# Altium PCB soldeerbout.PcbDoc (part 1 of 2)
Units mil, origin at the board's own origin, x right, y up, seen from the top; angles counter-clockwise.
Board outline 6625 x 4130 mil, 2 copper layers (Top Layer, Bottom Layer); 76 components, 74 nets, 291 pads, 71 vias.
Unrouted connection lines stored in the file: 2.
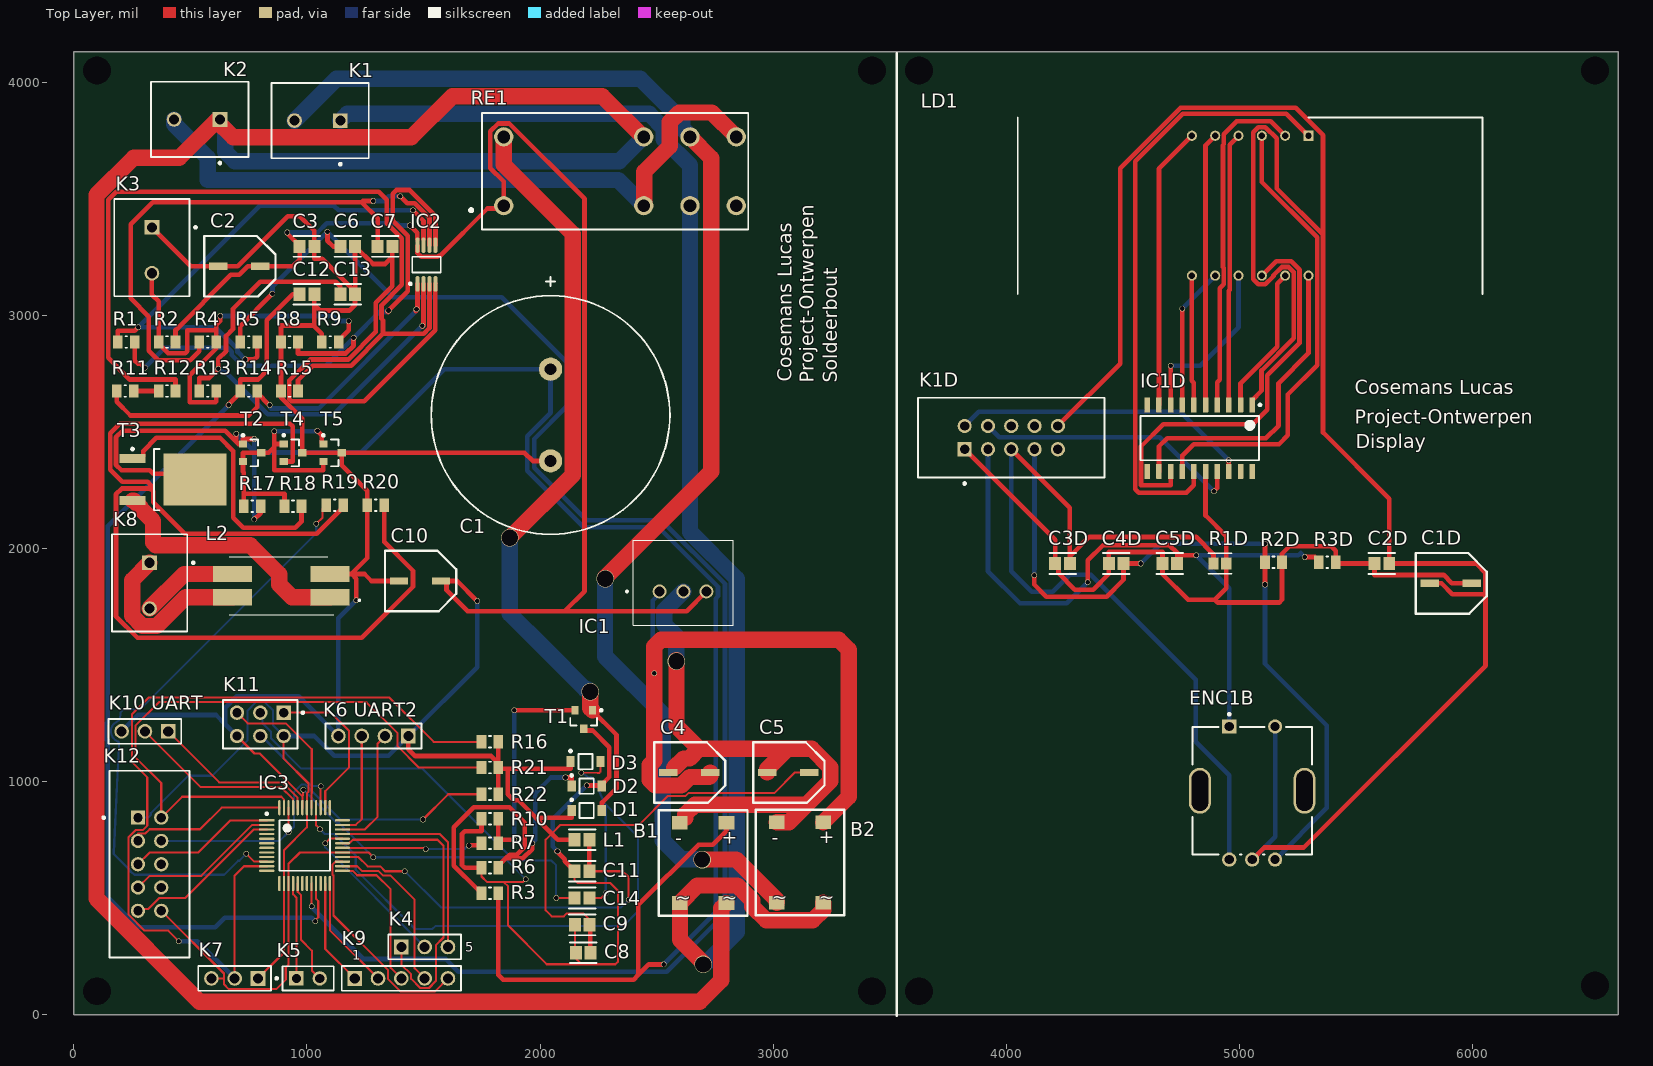
[diagram p0: Top Layer view]
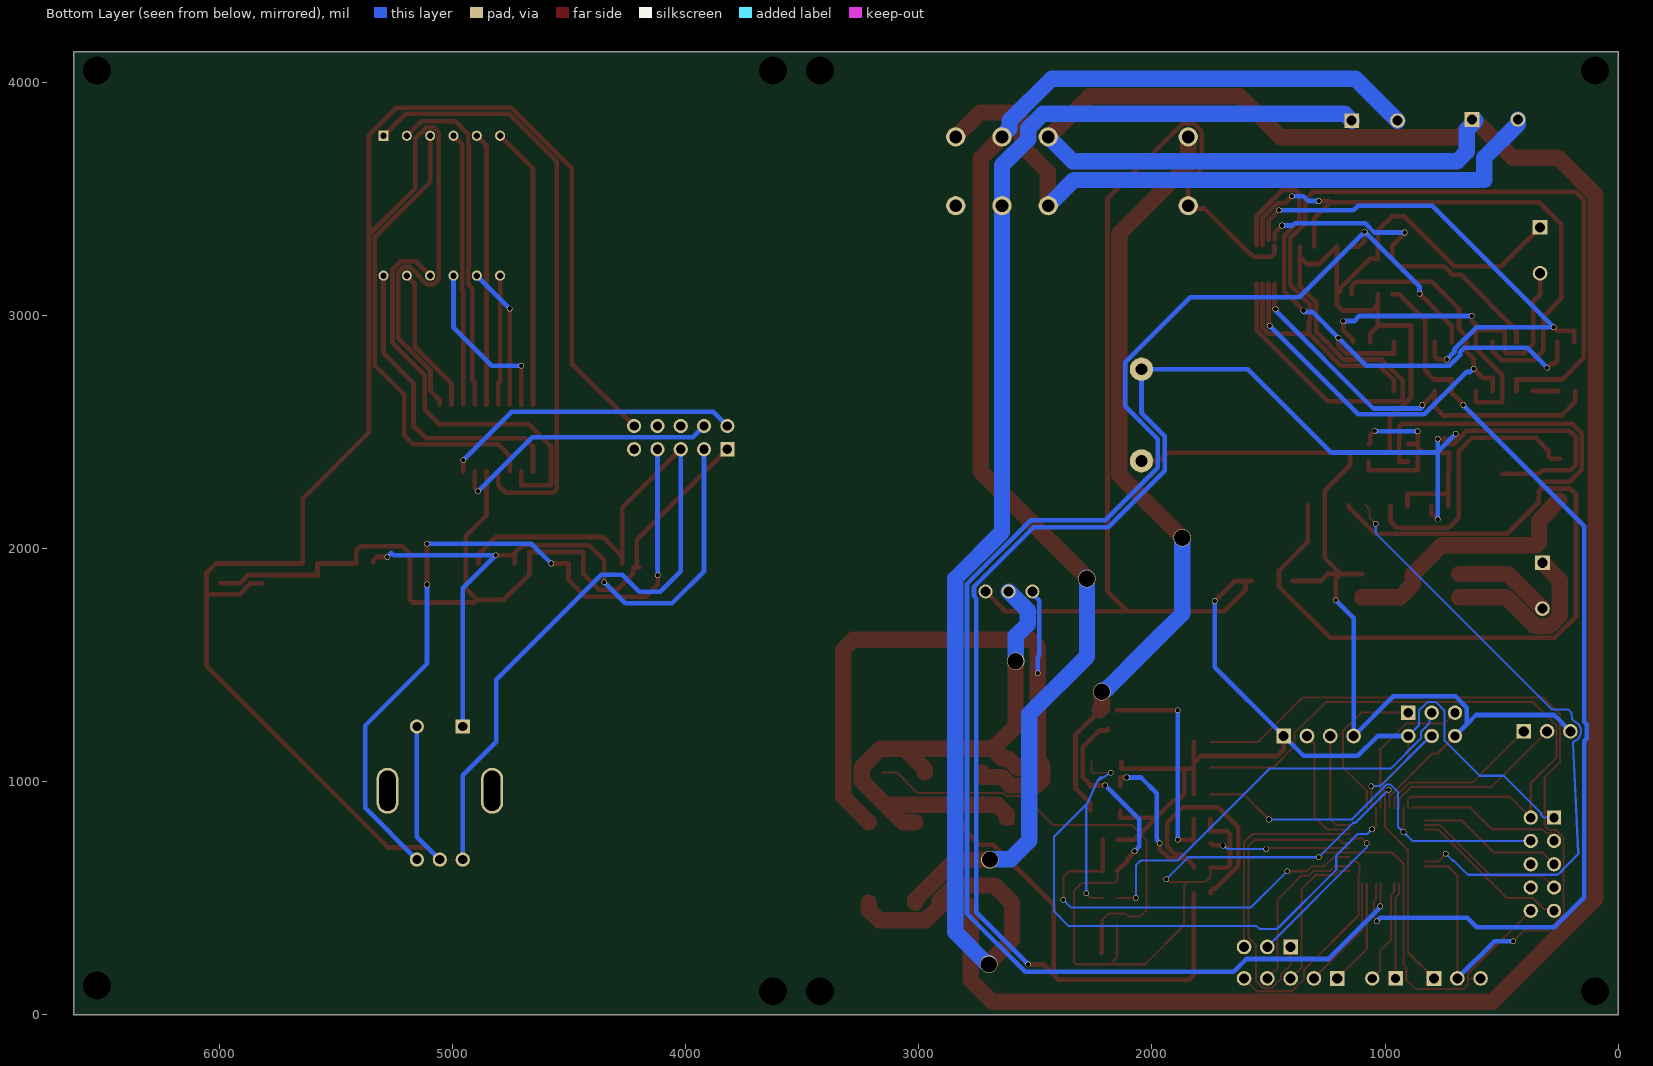
[diagram p1: Bottom Layer view, seen from below]

## Layer stack, top to bottom
Top Solder: solder mask 0.4, Solder Resist, Dk 3.5
Top Layer: signal copper 1.4
Dielectric 1: dielectric 12.6, FR-4, Dk 4.8
Bottom Layer: signal copper 1.4
Bottom Solder: solder mask 0.4, Solder Resist, Dk 3.5

## Board outline
0,0 6625,0 6625,4130 0,4130

## Design rules (kind name [scope] priority, off if disabled: settings)
Clearance [All] p1: gap=5 ignorepadtopadclearanceinfootprint=FALSE
ComponentClearance [All] p1: gap=5 collisioncheckmode=3 verticalgap=10 showdistances=FALSE
HoleSize [All] p1: absolutevalues=TRUE maxlimit=200 minlimit=1 maxpercent=80.000 minpercent=20.000
MinimumSolderMaskSliver [All] p1: minsoldermaskwidth=9
PolygonConnect [All] p1: connectstyle=Relief reliefconductorwidth=10 reliefentries=4 polygonreliefangle="90 Angle" airgapwidth=10
RoutingVias [All] p1: holewidth=20 width=24 viastyle="Through Hole" minholewidth=20 minwidth=24 maxholewidth=20 maxwidth=24
SilkToSolderMaskClearance [IsPad] p1: minsilkscreentomaskgap=5 clearancetoexposedcopper=TRUE
SolderMaskExpansion [All] p1: expansion=4 istentingtop=FALSE useseparateexpansions=TRUE expansionbottom=4 istentingbottom=FALSE soldermaskfromhole=TRUE
Width [All] p1: maxlimit=100 minlimit=9 preferedwidth=20 minimp=50.000000 maximp=50.000000 favimp=50.000000
26 further rules are at their usual default settings.

## Classes and differential pairs
component class voeding: B1 B2 C1 C4 C5 D1 D2 IC1 K1 K2 R3 R6 R7 R10 RE1 T1
component class thermokoppel: C2 C3 C6 C7 C12 C13 IC2 K3 R1 R2 R4 R5 R8 R9 R11 R12 R13 R14 R15
component class PWM_Soldeerbout: K8 L2 R17 R18 R19 R20 T2 T3 T4 T5
component class Display: C1D C2D C3D C4D C5D ENC1B IC1D K1D LD1 R1D R2D R3D
component class CPU: C8 C9 C10 C11 C14 D3 IC3 K4 K5 "K6 UART2" K7 K9 "K10 UART" K11 K12 L1 R16 R21 R22

## Components (designator, comment, footprint, x,y, rotation, side; value= is the part's Value field where it differs from the comment)
B1 "Bridge_Rectifier" ttf 2700,648.35 r0 top
B2 "Bridge_Rectifier" ttf 3115,650 r0 top
C1 "4700µf" CE_D25_L25_plugin 2045,2375 r90 top
C1D "100µf" CE_D6,3_L4,5 5906.42,1850 r0 top
C2 "10µf" CE_D6,3_L4,5 710,3210 r0 top
C2D "100nf" CC_0805_L 5611.42,1935 r0 top value="0.22 μF"
C3 "100nF" CC_0805_L 1000,3295 r0 top value="0.22 μF"
C3D "10nf" CC_0805_L 4241.42,1935 r0 top value="0.22 μF"
C4 "100µf" CE_D6,3_L4,5 2640,1038.35 r0 top
C4D "10nf" CC_0805_L 4471.42,1935 r0 top value="0.22 μF"
C5 "10µf" CE_D6,3_L4,5 3065,1038.35 r0 top
C5D "10nf" CC_0805_L 4701.42,1935 r0 top value="0.22 μF"
C6 "10nF" CC_0805_L 1175,3295 r0 top value="0.22 μF"
C7 "10nF" CC_0805_L 1335,3295 r0 top value="0.22 μF"
C8 "100nf" CC_0805_L 2185,265 r180 top value="0.22 μF"
C9 "100nf" CC_0805_L 2181.53,385 r180 top value="0.22 μF"
C10 "10µf" CE_D6,3_L4,5 1485,1860 r0 top
C11 "100nf" CC_0805_L 2180,615 r180 top value="0.22 μF"
C12 "10nF" CC_0805_L 1000,3090 r0 top value="0.22 μF"
C13 "10nF" CC_0805_L 1175,3090 r0 top value="0.22 μF"
C14 "100nf" CC_0805_L 2180,500 r0 top value="0.22 μF"
D1 "Diode" SOD-123FL 2200,875 r0 top value=15pF
D2 "Zener_Diode" SOD-123FL 2200,980.05 r0 top
D3 "Diode" SOD-123FL 2195,1085 r0 top value=15pF
ENC1B "PEC11R-4220F-S0012" PEC11R_4220F_S0012 5055,960 r0 top
IC1 "OKI-78SR-5/1.5-W36-C" OKI78SR515W36C 2512.64,1815 r0 top
IC1D "TM1637" SOP_20_M 4830,2472.72 r270 top
IC2 "Dual_Opamp" MSOP_8_M 1512.8,3217.32 r90 top
IC3 "ATMEGA4809" TQFP_48_M 990,725 r0 top
K1 "282836-2" "2x1 Schroef pin TECO-282836-2_V" 1045,3835 r180 top
K1D "1-1634688-0" "5x2 pin - TECO-1-1634688-0-10_V" 4021.42,2475 r0 top
K2 "282836-2" "2x1 Schroef pin TECO-282836-2_V" 528.43,3840 r180 top
K3 "282836-2" "2x1 Schroef pin TECO-282836-2_V" 335,3278.43 r270 top
K4 "61300311121" "3x1 pin" 1505,290 r0 top
K5 "M20-9990246" "2x1 pin" 1005,155 r0 top
"K6 UART2" "61300411121" "4x1 pin" 1285,1195 r180 top
K7 "61300311121" "3x1 pin" 690,155 r180 top
K8 "282836-2" "2x1 Schroef pin TECO-282836-2_V" 325,1840 r270 top
K9 "61300511121" "5x1 pin" 1405,155 r0 top
"K10 UART" "61300311121" "3x1 pin" 305,1215 r180 top
K11 "3x2 Pin_1" "3x2 pin FP-M20-9980346-MFG" 800,1245 r180 top
K12 "1-1634688-0" "5x2 pin - TECO-1-1634688-0-10_V" 325,645 r270 top
L1 "Choke" CC_0805_L 2180,750 r180 top
L2 "Common_Mode_Choke" 2545 890,1840 r90 top
LD1 "7SEG - KW4-801AVB" "7SEG - ELF-5125" 5296.42,3770 r270 top
R1 "18Kohm" R_0805_M 225,2885 r0 top
R1D "10K" CC_0805_m 4916.42,1935 r0 top
R2 "1Mohm" R_0805_M 400,2885 r0 top
R2D "10K" R_0805_M 5146.42,1940 r0 top
R3 "68Kohm" R_0805_M 1785,520 r0 top
R3D "10K" R_0805_M 5376.42,1940 r0 top
R4 "5.6Kohm" R_0805_M 575,2885 r0 top
R5 "5.6Kohm" R_0805_M 750,2885 r0 top
R6 "10Kohm" R_0805_M 1785,630 r0 top
R7 "10Kohm" R_0805_M 1785,735 r0 top
R8 "100ohm" R_0805_M 925,2885 r0 top
R9 "10Mohm" R_0805_M 1100,2885 r0 top
R10 "47Kohm" R_0805_M 1785,840 r0 top
R11 "18Kohm" R_0805_M 220,2675 r0 top
R12 "18Kohm" R_0805_M 400,2675 r0 top
R13 "5.6Kohm" R_0805_M 575,2675 r0 top
R14 "5.6Kohm" R_0805_M 750,2675 r0 top
R15 "100ohm" R_0805_M 925,2675 r0 top
R16 "47Kohm" R_0805_M 1785,1170 r180 top
R17 "47Kohm" R_0805_M 765,2180 r0 top
R18 "100ohm" R_0805_M 940,2180 r0 top
R19 "10Kohm" R_0805_M 1120,2185 r0 top
R20 "47Kohm" R_0805_M 1295,2185 r0 top
R21 "47Kohm" R_0805_M 1785,1060 r180 top
R22 "47Kohm" R_0805_M 1785,945 r180 top
RE1 "RELAY_GENERAL_PURPOSE" RT42 1844.21,3617.64 r0 top
T1 "Transistor_NPN" SOT_23 2187.4,1265.63 r270 top
T2 "Transistor_NPN" SOT_23 765,2410 r0 top
T3 "MOSFET_P (IRF9Z34NPBF)" TO_252 425,2295 r0 top
T4 "Transistor_NPN" SOT_23 940,2410 r0 top
T5 "Transistor_PNP" SOT_23 1110,2410 r0 top

## Footprints (in the part's own frame and the unit in brackets; to place one, negate y for a bottom-side part, rotate by r counter-clockwise, add the part's x,y. Pads: shape width x height; smd on the part's side, far side on the other; paste and mask are expansions set on the pad)
"2x1 pin" [mm]
  rect 1.57x1.57 hole 1.02 paste-1000 mask+0: 1(-1.27,0)
  round 1.57 hole 1.02 paste-1000 mask+0: 2(1.27,0)
  silkscreen extent -3.55,-1.32 2.79,1.32, body extent -2.89,-1.42 2.89,1.42, height 0.25
"2x1 Schroef pin TECO-282836-2_V" [mm] "Female Header, Pitch 5mm, 1 x 2 Position, Height 10mm"
  rect 1.6x1.6 hole 1.1: 1(-2.5,0)
  round 1.6 hole 1.1: 2(2.5,0)
  silkscreen extent -5.6,-4.1 5,4.87, body extent -5.6,-4.1 5,4.1, height 10
"3x1 pin" [mm] "Pin Header, pitch 2.54 mm, THT, Vertical, single row, 3p"
  rect 1.6x1.6 hole 1.1: 1(-2.54,0)
  round 1.6 hole 1.1: 2(0,0) 3(2.54,0)
  silkscreen extent -3.96,-1.34 3.96,1.34, body extent -3.81,-1.27 3.81,1.27, height 8.57
"3x2 pin FP-M20-9980346-MFG" [mm]
  rect 1.57x1.57 hole 1.02 paste-1000 mask+0: 1(-2.54,-1.27)
  round 1.57 hole 1.02 paste-1000 mask+0: 2(-2.54,1.27) 3(0,-1.27) 4(0,1.27) 5(2.54,-1.27) 6(2.54,1.27)
  silkscreen extent -4.76,-2.64 4.06,2.64, body extent -4.16,-2.74 4.16,2.74, height 0.25
"4x1 pin" [mm] "Pin Header, pitch 2.54 mm, THT, Vertical, single row, 4p"
  rect 1.6x1.6 hole 1.1: 1(-3.81,0)
  round 1.6 hole 1.1: 2(-1.27,0) 3(1.27,0) 4(3.81,0)
  silkscreen extent -5.23,-1.34 5.23,1.34, body extent -5.08,-1.27 5.08,1.27, height 8.57
"5x1 pin" [mm] "Pin Header, pitch 2.54 mm, THT, Vertical, single row, 5p"
  rect 1.6x1.6 hole 1.1: 1(-5.08,0)
  round 1.6 hole 1.1: 2(-2.54,0) 3(0,0) 4(2.54,0) 5(5.08,0)
  silkscreen extent -6.5,-1.34 6.5,1.34, body extent -6.35,-1.27 6.35,1.27, height 8.57
"5x2 pin - TECO-1-1634688-0-10_V" [mm] "10-Pin Connector, Body 20.35x8.7mm, Pitch 2.54mm"
  rect 1.55x1.55 hole 1.02: 1(-5.08,-1.27)
  round 1.55 hole 1.02: 2(-5.08,1.27) 3(-2.54,-1.27) 4(-2.54,1.27) 5(0,-1.27) 6(0,1.27) 7(2.54,-1.27) 8(2.54,1.27) 9(5.08,-1.27) 10(5.08,1.27)
  silkscreen extent -10.18,-5.12 10.18,4.35, body extent -10.17,-4.35 10.18,4.65, height 9
"7SEG - ELF-5125" [mm]
  rect 1.1x1.1 hole 0.7: 1(0,0)
  round 1.1 hole 0.7: 2(0,-2.54) 3(0,-5.08) 4(0,-7.62) 5(0,-10.16) 6(0,-12.7) 7(15.24,-12.7) 8(15.24,-10.16) 9(15.24,-7.62) 10(15.24,-5.08) 11(15.24,-2.54) 12(15.24,0)
  silkscreen extent -2.01,-31.68 17.24,18.97
2545 [mm]
  rect 1.78x4.27 smd: 1(-1.27,-5.305) 2(1.27,-5.305) 3(1.27,5.305) 4(-1.27,5.305)
  silkscreen extent -3.15,-8.6 3.15,5.69, body extent -3.15,-7.26 3.15,7.26, height 9.6
CC_0805_L [mil]
  rect 51.36x57.33 smd paste+0 mask+0: 1(-31.53,0) 2(31.53,0)
  silkscreen extent -57,-44 57,44, body extent -67,-39 67,39, height 10
CC_0805_m [mil]
  rect 43.49x53.39 smd paste+0 mask+0: 1(-27.59,0) 2(27.59,0)
  silkscreen extent -49,-44 49,44, body extent -53,-32 53,32, height 10
CE_D6,3_L4,5 [mm]
  rect 2x0.8 smd: 1(-2.286,0) 2(2.286,0)
  silkscreen extent -3.81,-3.3 3.94,3.3
CE_D25_L25_plugin [mm]
  round 2.54 hole 1.27: 1(0,0) 2(10,0)
  silkscreen extent -8,-13 20.07,13
MSOP_8_M [mm] "TSOP, 8-Leads, Body 3x3mm, Pitch 0.65mm, IPC Medium Density"
  oval 1.7x0.45 smd: 1(-2.1,0.975) 2(-2.1,0.325) 3(-2.1,-0.325) 4(-2.1,-0.975) 5(2.1,-0.975) 6(2.1,-0.325) 7(2.1,0.325) 8(2.1,0.975)
  silkscreen extent -2.22,-1.55 0.85,1.87, body extent -1.55,-1.55 1.55,1.55, height 1.1
OKI78SR515W36C [mm]
  round 1.519 hole 1.08: 1(0,0) 2(2.6,0) 3(5.1,0)
  silkscreen extent -3.6,-3.7 8.05,5.6, body extent -2.85,-3.7 8.05,5.6, height 16.6
PEC11R_4220F_S0012 [mm]
  rect 1.55x1.55 hole 1 paste-1000 mask+0: 1(-2.5,7)
  round 1.55 hole 1 paste-1000 mask+0: 2(2.5,7) A(-2.5,-7.5) B(2.5,-7.5) C(0,-7.5)
  rrect100% 2.4x5 hole 4.4 slot 1.8 at 0 deg paste-1000 mask+0: 3(-5.7,0) 4(5.7,0)
  silkscreen extent -6.5,-6.95 6.5,8.45, body extent -7,-8.37 7,7.88, height 0.25
R_0805_M [mm] "Chip Resistor, 2-Leads, Body 2.00x1.25mm, IPC Medium Density"
  rect 1.05x1.45 smd: 1(-0.925,0) 2(0.925,0)
  silkscreen extent -0.1,-0.62 0.1,0.62, body extent -1.1,-0.72 1.1,0.72, height 0.5
RT42 [mm]
  round 2.1 hole 1.4: 11(20.3,-3.75) 12(15.26,-3.75) 14(25.34,-3.75) 21(20.3,3.75) 22(15.26,3.75) 24(25.34,3.75) A1(0,-3.75) A2(0,3.75)
  silkscreen extent -3.67,-6.35 26.65,6.35, body extent -2.21,-6.35 26.79,6.35, height 15.86
SOD-123FL [mm] "SOD, 2-Leads, Body 2.7x1.65mm"
  rect 0.91x1.22 smd: 1(-1.635,0) 2(1.635,0)
  silkscreen extent -1.76,-0.82 0.78,1.28, body extent -1.35,-0.82 1.35,0.82, height 1
SOP_20_M [mm] "SOIC,20-Leads,Body 12.9x5.6mm,Pitch 1.27mm,IPC Medium Density"
  rrect17% 1.65x0.6 smd: 1(-3.625,5.715) 2(-3.625,4.445) 3(-3.625,3.175) 4(-3.625,1.905) 5(-3.625,0.635) 6(-3.625,-0.635) 7(-3.625,-1.905) 8(-3.625,-3.175) 9(-3.625,-4.445) 10(-3.625,-5.715) 11(3.625,-5.715) 12(3.625,-4.445) 13(3.625,-3.175) 14(3.625,-1.905) 15(3.625,-0.635) 16(3.625,0.635) 17(3.625,1.905) 18(3.625,3.175) 19(3.625,4.445) 20(3.625,5.715)
  silkscreen extent -3.75,-6.45 2.4,6.69, body extent -2.8,-6.45 2.8,6.45, height 2
SOT_23 [mm] "SOT23, 3-Leads, Body 2.92x1.3mm, Pitch 0.95mm"
  rect 0.9x0.8 smd: 1(-1,0.95) 2(-1,-0.95) 3(1,0)
  silkscreen extent -1.12,-1.46 0.65,2.03, body extent -0.65,-1.46 0.65,1.46, height 1.11
TO_252 [mm] "DPAK, 3-Leads, Body 6.5x6.12mm, Pitch 2.28mm, IPC Low Density"
  rect 2.85x1 smd: 1(-4.4,2.28) 3(-4.4,-2.28)
  rect 6.9x5.65 smd: 2(2.4,0)
  silkscreen extent -4.52,-3.35 -1.45,3.45, body extent -2.05,-3.32 4.17,3.32, height 2.35
TQFP_48_M [mm]
  rect 1.655x0.252 smd paste+0 mask+0: 1(-4.125,2.75)
  rrect100% 1.655x0.252 smd paste+0 mask+0: 2(-4.125,2.25) 3(-4.125,1.75) 4(-4.125,1.25) 5(-4.125,0.75) 6(-4.125,0.25) 7(-4.125,-0.25) 8(-4.125,-0.75) 9(-4.125,-1.25) 10(-4.125,-1.75) 11(-4.125,-2.25) 12(-4.125,-2.75) 25(4.125,-2.75) 26(4.125,-2.25) 27(4.125,-1.75) 28(4.125,-1.25) 29(4.125,-0.75) 30(4.125,-0.25) 31(4.125,0.25) 32(4.125,0.75) 33(4.125,1.25) 34(4.125,1.75) 35(4.125,2.25) 36(4.125,2.75)
  rrect100% 0.252x1.655 smd paste+0 mask+0: 13(-2.75,-4.125) 14(-2.25,-4.125) 15(-1.75,-4.125) 16(-1.25,-4.125) 17(-0.75,-4.125) 18(-0.25,-4.125) 19(0.25,-4.125) 20(0.75,-4.125) 21(1.25,-4.125) 22(1.75,-4.125) 23(2.25,-4.125) 24(2.75,-4.125) 37(2.75,4.125) 38(2.25,4.125) 39(1.75,4.125) 40(1.25,4.125) 41(0.75,4.125) 42(0.25,4.125) 43(-0.25,4.125) 44(-0.75,4.125) 45(-1.25,4.125) 46(-1.75,4.125) 47(-2.25,4.125) 48(-2.75,4.125)
  silkscreen extent -4.25,-2.75 2.75,3.58, body extent -5.2,-5.2 5.2,5.2, height 0.25
ttf [mm]
  rect 1.7x1.5 smd: 1(2.54,4.445) 2(-2.54,4.445) 3(-2.54,-4.318) 4(2.54,-4.318)
  silkscreen extent -4.83,-5.7 4.83,5.8

## Part data
B1 B2: Average Rectified Current-Max=0.8A, Forward Voltage=1V, Manufacturer="Diodes Inc", Package Description="4-Pin Small Outline Integrated Circuit, Body 4.7 x 3.8 mm, Pitch 2.5 mm", Package Reference=MiniDIP-4, Package Version=05/2016, Peak Current-Max=30A, Reverse Current-Max=5µA, Reverse Voltage-Max [Vrrm]=600V, Datasheet URL=http://www.diodes.com/_files/datasheets/ds17003.pdf, Datasheet Version="Rev. 13-2, 12/2010", Manufacturer URL=http://www.diodes.com/, Mounting Technology=SurfaceMount, Package URL=http://www.diodes.com/_files/packages/MiniDIP.pdf
C1 C1D C2 C4 C5 C10: library part Capacitor_Electrolytic, Manufacturer=Panasonic, Max Operating Temperature="105 degC", Min Operating Temperature="-55 degC", Package Quantity=500, Voltage Rating="25 V", ComponentLink1Description="Manufacturer URL", ComponentLink1URL=http://www.panasonic.com/, ComponentLink2Description=Datasheet, ComponentLink2URL=http://industrial.panasonic.com/cdbs/www-data/pdf/RDE0000/ABA0000C1181.pdf, DatasheetVersion=03/2016, Height="10.2 mm", Lead Pitch="3.1 mm", Length="10.2 mm", Mount="Surface Mount", Mounting Technology="Surface Mount", PackageDescription="2-Pin Electrolytic Aluminum Capacitor, Body 8.3 x 8.3 mm", PackageReference=EEE-FK1E221P, Packaging="Tape and Reel", Pins=2, REACH SVHC="No SVHC", RoHSCompliant=true
C2D C3 C3D C4D C5D C6 C7 C8 C9 C11 C12 C13 C14: library part Capacitor_Ceramic, Capacitance="0.22 μF", Manufacturer=KEMET, Manufacturer Part Number=C0805C224K5RACTU, Package=C0805C-DN, Temperature="-55°C to +125°C", Temperature Characteristic=X7R, Temperature Coefficient=30ppm/°C, Temperature Range High=+125°C, Temperature Range Low=-55°C, Tolerance=0.1, Voltage Rating="50 V", Automotive=No, Category=Cap, ComponentLink2Description=Datasheet, ComponentLink2URL=https://content.kemet.com/datasheets/KEM_C1003_C0G_SMD.pdf, Device Class L1="Passive Components", Device Class L2=Capacitors, Device Class L3="Ceramic Capacitors", Digikey Description="CAP CER 0.22UF 50V X7R 0805", Height=0.88mm, Ipc Land Pattern Name=CAPC200125X78, Lead Free=Yes, Material=Ceramic, Mouser Description="CAP CER 0.22UF 50V X7R 0805", Octopart=https://octopart.com/c0805c224k5ractu-kemet-144670, RoHS=TRUE
D1 D3: Capacitance=15pF, Forward Current=1A, Manufacturer=Diotec, Manufacturer Part Number=1N4007, Max Junction Temp=+175°C, Max Repetitive Reverse Voltage=1000V, Max Surge Forward Current=27A, Peak Reverse Current=5uA, Temperature="-50°C to +175°C", Temperature Range Low=-50°C, Automotive=No, Category=Diode, ComponentLink2Description=Datasheet, ComponentLink2URL=https://datasheet.octopart.com/1N4007-Diotec-datasheet-62346875.pdf, Device Class L1="Discrete Semiconductors", Device Class L2=Diodes, Device Class L3="Rectifier Diodes", Height=2.8mm, Ipc Land Pattern Name=DIOAD888W100L520D280, Lead Free=Yes, Octopart=https://octopart.com/1n4007-diotec-4040411, Package=1N4007, Reverse Voltage=1000V, RoHS=TRUE, Temperature Range High=+175°C
D2: Manufacturer="On Semiconductor", PartNumber=1SMB5920BT3G, ComponentLink1Description="Manufacturer URL", ComponentLink1URL=http://www.onsemi.com/, ComponentLink2Description=Datasheet, ComponentLink2URL=http://www.onsemi.com/pub_link/Collateral/1SMB5913BT3-D.PDF, ComponentLink3Description="Package Specification", ComponentLink3URL=http://www.onsemi.com/pub_link/Collateral/1SMB5913BT3-D.PDF, DatasheetVersion="Rev. 8", Mounting Technology="Surface Mount", PackageDescription="2-Pin Small Molded Package, J-Bend Lead, Body 4.33 x 3.625 mm", PackageReference=SMB-2-403A-03_H, PackageVersion="Rev. H, 05/2011", Packing="Tape and Reel", RoHS=Pb-Free, VZ Typ (V)=6.2
ENC1B: "ROTARY ENCODER MECHANICAL 12PPR", Max Operating Temperature=70°C, Min Operating Temperature=-30°C, Package Quantity=150, Built in Switch=Yes, Detent=Yes, Encoder Type=Mechanical, Height=13.4mm, Hole Diameter=7mm, Length=26.5mm, Mount="Through Hole", Number of Channels=2, Number of Pins=5, Orientation=Vertical, Output Type=Quadrature, Packaging=Bulk, Pulses per Revolution=12, Radiation Hardening=No, REACH SVHC="No SVHC", RoHS Compliant=Yes, Series=PEC11R, Termination="PC Pin", Type=Mechanical, Width=12.5mm
IC1: "Non-Isolated DC/DC Converter, 7.5 W, 7 to 36 V, 1.5 A, -40 to 85 degC, 3-Pin THD, RoHS", Current - Output (Max)=1.5A, Manufacturer=Murata, Operating Temperature=-40degC~85degC, Package / Case=3-SIPModule, Power (Watts) - Manufacture Series=8W, Voltage - Input (Max)=36V, Voltage - Input (Min)=7V, Voltage - Isolation=-, Voltage - Output 1=5V, Applications=ITE(Commercial), Category=PowerSupplies-BoardMount, Datasheet URL=https://datasheet.ciiva.com/8006/1790439-8006672.pdf, Datasheet Version=Oct-13, Efficiency=90.5%, Family=DCDCConverters, Features=SCP, Manufacturer URL=http://www.murata.com/, Mounting Type=ThroughHole, Number of Outputs=1, Packaging=Tube, Power (Watts) - Max=8W, Series=Okami™OKI-78SR, Size / Dimension="0.41\"Lx0.30\"Wx0.65\"H(10.4mmx7.6mmx16.5mm)", Type=LinearRegulatorReplacement, Voltage - Output 2=-, Voltage - Output 3=-
IC1D: "LED Drive Control Special Circuit", Package=Package, Availability="Not in stock", Check_prices=https://www.snapeda.com/parts/TM1637/Titan+Micro+Electronics/view-part/?ref=eda, MF="Titan Micro Electronics", MP=TM1637, Price=None, SnapEDA_Link=https://www.snapeda.com/parts/TM1637/Titan+Micro+Electronics/view-part/?ref=snap
IC2: Case/Package=PDIP, Input Bias Current=1pA, Input Offset Voltage (Vos)=4.5mV, Max Operating Temperature=125°C, Max Supply Voltage=6V, Min Operating Temperature=-40°C, Min Supply Voltage=1.8V, Nominal Supply Current=100uA, Operating Supply Voltage=5.5V, Output Current=23mA, Package Quantity=60, Power Supply Rejection Ratio (PSRR)=86dB, Voltage Gain=112dB, Amplifier Type="GENERAL PURPOSE", Bandwidth=1MHz, Common Mode Rejection Ratio=60dB, Gain Bandwidth Product=1MHz, Height=3.3mm, Input Offset Voltage-Max=4.5mV, Lead Free="Lead Free", Length=9.27mm, Mount="Through Hole", Number of Amplifiers=2, Number of Channels=2, Number Of Circuits=2, Number of Elements=2, Number of Pins=8, Operating Supply Current=100uA, Output Current per Channel=23mA, Packaging=Rail/Tube, Radiation Hardening=No, REACH SVHC="No SVHC", RoHS Compliant=Yes, Slew Rate=0.6V/µs, Slew Rate-Nom=0.6V/µs, Supply Current=100uA, Technology=CMOS, Unity Gain Bandwidth Product=1MHz, Width=6.35mm
IC3: Case/Package=TQFP, Max Operating Temperature=85°C, Min Operating Temperature=-40°C, Core Architecture=AVR, Interface=I2C, Memory Size=48KB, Memory Type=FLASH, Mount="Surface Mount", Number of I/Os=41, Oscillator Type=Internal, Peripherals="Brown-out Detect/Reset", RoHS Compliant=Yes, Series="megaAVR® 0, Functional Safety (FuSa)"
K1 K2 K3 K8: library part "2x1 schroef pin", "Female Header, Pitch 5 mm, 1 x 2 Position, Height 10 mm, Tail Length 3.5 mm, Rohs, Bulk", Color=Green, Current=13.5A, Manufacturer="TE Connectivity", Package Description="Female Header, Pitch 5 mm, 1 x 2 Position, Height 10 mm, Tail Length 3.5 mm", Package Reference=THD, Standard Package=300, Voltage=300V, 3D Model=282836-2.pdf, Category=Connectors,Interconnects, Clamp Material - Plating=Brass-NickelPlated, Contact Material - Plating=Brass-TinPlated, Datasheet URL=http://www.te.com.cn/commerce/DocumentDelivery/DDEController?Action=showdoc&DocId=Catalog+Section%7F1308389_EUROSTYLE_TERMINAL_BLOCKS%7F0607%7Fpdf%7FEnglish%7FENG_CS_1308389_EUROSTYLE_TERMINAL_BLOCKS_0607.pdf%7F282836-2, Dynamic Catalog=BuchananSeries, Family=TerminalBlocks-WiretoBoard, Featured Product=EurostyleTerminalBlockConnectors, Features=Interlocking(Side), Housing Material=Polyamide(PA66),Nylon6/6, Manufacturer URL=http://www.te.com, Mating Orientation=HorizontalwithBoard, Mounting Type=ThroughHole, Number of Levels=1, Other Names="5ULV-02B / A98076", Packaging=Bulk, Pitch="0.197\"(5.00mm)", Positions Per Level=2, Product Training Modules=Wire-to-BoardEurostyleTerminalBlocks, RoHS Information=282836-2StatementofCompliance, Screw Material - Plating=Brass-NickelPlated, Screw Thread=M3, Series=Buchanan, Torque - Screw=0.68Nm(6Lb-In), Wire Gauge=16-30AWG, Wire Termination=Screw-RisingCageClamp
K1D K12: library part "5x2 Pin", "Male Header, Pitch 2.54 mm, 2 x 5 Postion, Height 9.15 mm, Tail Length 3.2 mm, -40 to 105 degC, RoHS, Bulk", Manufacturer="TE Connectivity", Package Description="10-Pin Connector, Body 20.35 x 8.7 mm, Pitch 2.54 mm", Package Version="Rev. C2, 02/2011", Contact Material=Brass, Contact Plating=GoldPlatedContacts, Contact Termination Type=ThroughHole, Datasheet URL=https://datasheet.ciiva.com/6831/eng-cd-1634688-c2-6831201.pdf, Datasheet Version="Rev. C2, 02/2011", Gender=Header, Manufacturer URL=http://www.te.com/, Mounting Technology=ThroughHole, No. of Contacts=10Contacts, No. of Positions=10, No. of Rows=2, Orientation=Straight, Package Reference=1-1634688-0, Package URL=https://datasheet.ciiva.com/6831/eng-cd-1634688-c2-6831201.pdf, PartNumber=1-1634688-0, Pitch=2.54mm, Pitch Spacing=2.54mm, Product Range=-, SVHC=ToBeAdvised
K4 K7 "K10 UART": library part "3x1 pin", "THT Vertical Pin Header WR-PHD, Pitch 2.54 mm, Single Row, 3 pins", Contact Resistance=20mOhm, Manufacturer="Wurth Elektronik", Operating Temperature=-40to105degC, Rated Current=3A, Withstanding Voltage=500VAC, Working Voltage=250VAC, Datasheet URL=https://katalog.we-online.de/em/datasheet/6130xx11121.pdf, Gender=Male, Manufacturer URL=http://www.we-online.de, Mounting Technology=THT, Orientation=Vertical, Package Reference=61300311121, Packaging=Bag, Part Number=61300311121, Pin Number=3, Pitch=2.54mm, Publisher=WurthElektronik, Row Number=Single
K5: library part "2x1 pin", "CONN HEADER VERT 2POS 2.54MM", Current Rating=3A, Manufacturer=Harwin, Temperature="-40°C to +105°C", Temperature Range High=+105°C, Temperature Range Low=-40°C, Automotive=No, Category=Conn, ComponentLink2Description=Datasheet, ComponentLink2URL=https://cdn.harwin.com/pdfs/M20-999.pdf, Conn Gender=Male, Conn Orientation=Vertical, Contact Material=Tin,Nickel, Device Class L1=Connectors, Device Class L2="Headers and Wire Housings", Device Class L3=unset, Digikey Description="CONN HEADER VERT 2POS 2.54MM", Height=8.99mm, Lead Free=Yes, Manufacturer Part Number=M20-9990246, Mouser Description="2.54mm (0.1\") Pitch SIL Vertical PC Tail Pin Header, 6.1mm mating pin height, tin, 2 contacts", Number Of Contacts=2, Number Of Rows=1, Octopart=https://octopart.com/m20-9990246-harwin-2590635, Package=M20-9990246, Pitch=2.54mm, RoHS=TRUE
"K6 UART2": library part "4x1 pin", "THT Vertical Pin Header WR-PHD, Pitch 2.54 mm, Single Row, 4 pins", Contact Resistance=20mOhm, Manufacturer="Wurth Elektronik", Operating Temperature=-40to105degC, Rated Current=3A, Withstanding Voltage=500VAC, Working Voltage=250VAC, Datasheet URL=https://katalog.we-online.de/em/datasheet/6130xx11121.pdf, Gender=Male, Manufacturer URL=http://www.we-online.de, Mounting Technology=THT, Orientation=Vertical, Package Reference=61300411121, Packaging=Bag, Part Number=61300411121, Pin Number=4, Pitch=2.54mm, Publisher=WurthElektronik, Row Number=Single
K9: library part "5x1 pin", "THT Vertical Pin Header WR-PHD, Pitch 2.54 mm, Single Row, 5 pins", Contact Resistance=20mOhm, Manufacturer="Wurth Elektronik", Operating Temperature=-40to105degC, Rated Current=3A, Withstanding Voltage=500VAC, Working Voltage=250VAC, Datasheet URL=https://katalog.we-online.de/em/datasheet/6130xx11121.pdf, Gender=Male, Manufacturer URL=http://www.we-online.de, Mounting Technology=THT, Orientation=Vertical, Package Reference=61300511121, Packaging=Bag, Part Number=61300511121, Pin Number=5, Pitch=2.54mm, Publisher=WurthElektronik, Row Number=Single
L1: Case/Package=1350, Current Rating=8.5A, DC Resistance (DCR)=14.1mR, Inductance=10uH, Inductance Tolerance=20%, Max Operating Temperature=155°C, Min Operating Temperature=-40°C, Package Quantity=1, Ratings=AEC-Q200, Resistor Type=Wirewound, Saturation Current=10A, Self Resonant Frequency=18MHz, Series Resistance=14.1R, Test Frequency=100kHz, Height=4.7mm, Height - Seated (Max)=0.197inch, Length=0.512inch, Max DC Current=8.5A, Mount="Surface Mount", Packaging="Tape and Reel", RMS Current (Irms)=8.5A, RoHS Compliant=Yes, Series=WE-HCI, Shielding=Shielded, Termination=SMD/SMT, Tolerance=20%, Width=12.8mm
L2: Case/Package=1808, Current=2A, Current Rating=2.3A, DC Resistance (DCR)=60mR, Insulation Resistance=10MR, Max Operating Temperature=85°C, Max Voltage Rating (DC)=50V, Min Operating Temperature=-40°C, Package Quantity=1, Test Frequency=100MHz, DC Current=2A, DC Resistance-Max=60mR, Depth=4.7mm, Element Configuration=Dual, Height=2mm, Impedance=900R, Lead Free="Lead Free", Length=0.185inch, Max Current Rating=2A, Max DC Current=2A, Mount="Surface Mount", Number of Lines=2, Number of Pins=4, Packaging="Tape and Reel", Radiation Hardening=No, REACH SVHC="No SVHC", RoHS Compliant=Yes, Series=ACM, Termination=Flat, Voltage Rating=50V, Voltage Rating (DC)=50V, Width=4.5mm
LD1: "4-Digit LED Display"
R1 R1D R2 R2D R3 R3D R4 R5 R6 R7 R8 R9 R10 R11 R12 R13 R14 R15 R16 R17 R18 R19 R20 R21 R22: library part Resistor, Manufacturer="Vishay Dale", Part Number=CRCW08050000Z0EA
RE1: Ambient Temperature Range High=+85°C, Ambient Temperature Range Low=-40°C, Coil Power=403mW, Coil Resistance=62Ω, Coil Voltage=5V, Current Rating=8A, Manufacturer="TE Connectivity", Manufacturer Part Number=RT424005, Automotive=No, Category=Relay, Coil Type=Non-Latching, ComponentLink2Description=Datasheet, ComponentLink2URL=https://www.te.com/commerce/DocumentDelivery/DDEController?Action=showdoc&DocId=Data+Sheet%7FRT2%7F1014%7Fpdf%7FEnglish%7FENG_DS_RT2_1014.pdf%7F5-1393243-9, Device Class L1=Electromechanical, Device Class L2=Relays, Device Class L3="Power Relays", Digikey Description="RELAY GENERAL PURPOSE DPDT 8A 5V", Height=15.7mm, Lead Free=Yes, Mouser Description="General Purpose Relay, Rt2 Series, Power, Non Latching, Dpdt, 5 Vdc, 8 A Rohs Compliant: Yes", Number Of Contacts=2, Octopart=https://octopart.com/5-1393243-9-te+connectivity-41835766, Package=RT424005, RoHS=TRUE, Throw Configuration=DPDT
T1 T2 T4: Manufacturer="On Semiconductor", PartNumber=BC547C, ComponentLink1Description="Manufacturer URL", ComponentLink1URL=http://www.onsemi.com/, ComponentLink2Description=Datasheet, ComponentLink2URL=http://www.onsemi.com/pub_link/Collateral/BC546-D.PDF, ComponentLink3Description="Package Specification", ComponentLink3URL=http://www.onsemi.cn/pub_link/Collateral/2N6426-D.PDF, DatasheetVersion="Rev. 7", fT Min (MHz)=150, IC Continuous (A)=0.1, Mounting Technology="Through Hole", PackageDescription="3-Pin Transistor Outline, Body 4.825 x 3.685 mm, Pitch 1.27 mm", PackageReference=TO-92-3-29-11_AM_SL, PackageVersion="Rev. AM", Packing="Bulk Box", Polarity=NPN, RoHS=FALSE
T3: Continuous Drain Current Id=2.4A, Current Temperature=25°C, Drain Source Voltage Vds=20V, Manufacturer="Fairchild Semiconductor", On Resistance Rds(on)=52mohm, Operating Temperature Max=150°C, Operating Temperature Min=-55°C, Operating Temperature Range=-55°Cto+150°C, Package / Case=SOT-23, Package Description="3-Pin Small Outline Transistor, Body 2.92 x 1.4 mm, Pitch 0.95 mm", Package Reference=SSOT3L, Package Version="Rev. 3, 05/2015", Power Dissipation Pd=500mW, Pulse Current Idm=10A, Rds(on) Test Voltage Vgs=-4.5V, Threshold Voltage Vgs Typ=-800mV, Voltage Vds Typ=-20V, Voltage Vgs th Max=-1.5V, Current Id Max=2.4A, Datasheet URL=https://www.fairchildsemi.com/datasheets/FD/FDN304P.pdf, Datasheet Version="Rev. C, 01/2001", External Depth=2.5mm, External Length / Height=1.12mm, External Width=3.05mm, Full Power Rating Temperature=25°C, Manufacturer URL=https://www.fairchildsemi.com/, Mounting Technology=SurfaceMount, No. of Pins=3, Package URL=https://www.fairchildsemi.com/package-drawings/MA/MA03B.pdf, Reel Quantity=3000, SMD Marking=304P, SVHC=NoSVHC(19-Dec-2012), Tape Width=8mm, Termination Type=SMD, Transistor Case Style=SOT-23, Transistor Polarity=PChannel, Voltage Vds=20V, Voltage Vgs Max=-800mV, Voltage Vgs Rds on Measurement=-4.5V
T5: Manufacturer="On Semiconductor", PartNumber=BC557C, ComponentLink1Description="Manufacturer URL", ComponentLink1URL=http://www.onsemi.com/, ComponentLink2Description=Datasheet, ComponentLink2URL=http://www.onsemi.com/pub_link/Collateral/BC556B-D.PDF, ComponentLink3Description="Package Specification", ComponentLink3URL=http://www.onsemi.cn/pub_link/Collateral/2N6426-D.PDF, DatasheetVersion="Rev. 3", IC Continuous (A)=-0.1, Mounting Technology="Through Hole", PackageDescription="3-Pin Transistor Outline, Body 4.825 x 3.685 mm, Pitch 1.27 mm", PackageReference=TO-92-3-29-11_AM_SL, PackageVersion="Rev. AM", Packing="Bulk Box", Polarity=PNP, RoHS=FALSE

## Free pads (board coordinates)
  round 100 hole 120: 5(100,100) 6(3425,100) 7(3625,100) 8(6525,125) 9(6525,4050) 10(3625,4050) 11(3425,4050) 12(100,4050)

## Via types
v1: diameter 24, hole 20, Top Layer to Bottom Layer, 65 vias
v2: diameter 75, hole 70, Top Layer to Bottom Layer, 6 vias

## Nets (pads, with @x,y where several pads share a name; then routed paths per layer and width w, separated by ;. In a path a pad name is that pad's centre, name@x,y a point inside that pad or via, vN(x,y) a via of type N, cw(c..) or ccw(c..) an arc to the next point about the centre after c; other vN are vias at no path point)
+5: "K6 UART2.1" C1D.2 C2.2 C2D.1 C3.1 C3D.1 C4D.1 C5.2 C5D.1 C8.1 C9.1 C10.2 D1.1 D3.1 IC1.3 IC1D.16 IC2.8 IC3.14 IC3.42 K1D.1 K7.1 K11.2 K12.1 L1.2 R1D.2 R2.2 R2D.2 R3D.2 R16.1 R21.1 R22.1 RE1.A1 | length 16988.1
  Top Layer w9: K7.1 901.42,266.42 IC3.14 901.42,705 999.84,803.42 IC3.42 999.84,949.44 1006.5,956.09 1006.5,991.42 900,1097.92 K11.2 ; C9.1 2213.05,406.6 2185.66,434 2114.75,434 2102,421.25 2050,421.25 2023.72,447.54 2023.72,750 2050.17,776.46 2087.72,814 2425,814 2549.1,938.1 2624.37,938.1 2636.27,950 3003.94,950 3092.29,1038.35 C5.2
  Top Layer w20: R2.2 436.42,2936.42 673.79,3173.79 710,3173.79 746.21,3210 C2.2 940,3210 968.47,3238.47 C3.1 968.47,3297.98 v1@915.77,3350.69 ; 1435,1195 1435,1139 1465,1109 1790,1109 1821.42,1077.58 R16.1 ; v1(1442,3385) 1473.27,3353.73 IC2.8@1473.27,3323.46 ; IC2.8 1474.41,3265.83 1489.7,3250.54 1561.48,3250.54 1565.94,3255 1571.6,3255 1774.61,3458.01 1832.22,3458.01 RE1.A1 1844.21,3573.66 1786.87,3631 1786.87,3789.03 1820.46,3822.61 1867.96,3822.61 2191,3499.58 2191,1816 2105,1730 ; C10.2 C10.2@1599,1860 ; v1(1730,1774) 1644,1860 C10.2@1599,1860 ; R22.1 R21.1 ; R21.1@1821.42,1068.79 R21.1 ; D3.1 2130.63,1055 1861.33,1055 ; D1.1 2135.63,845 1981.63,845 2050.17,776.46 ; L1.2 2076.63,750 2050.17,776.46 ; C9.1 2214.79,383.26 2214.79,266.74 C8.1 ; IC1.3 2628.43,1730 2105,1730 ; K1D.1 4209.89,2036.53 C3D.1 ; C3D.1@4197.44,1919.56 4221.1,1919.56 4224.33,1916.33 4224.33,1892.67 4294,1823 4372.89,1823 4439.89,1890 C4D.1 4439.89,1984 4669.89,1984 C5D.1 4669.89,1890 4779.89,1780 4895,1780 ; IC1D.16 4855,2141.01 4944.01,2052 R1D.2 4944.01,1829.01 4895,1780 ; C1D.2 5912,1850 5876,1886 5579.89,1886 C2D.1 5412.83,1935 R3D.2 5412.83,1989 5393.3,2008.53 5215,2008.53 5182.83,1976.36 R2D.2 5182.83,1779.17 5171.12,1767.45 4907.55,1767.45 4895,1780 ; C10.2@1599,1860 1599,1820 1689,1730 2105,1730 ; R21.1 1826.42,1055 1861.33,1055 ; 1861.33,1055 1861.33,945 1887.18,919.15 1907.48,919.15 2050.17,776.46
  Bottom Layer w9: K12.1 319.01,845 329.99,855.98 329.99,863.64 490.86,1024.51 593.73,1024.51 745.41,1176.19 745.41,1304.62 781.19,1340.41 818.81,1340.41 854.35,1304.86 854.35,1240.65 K11.2
  Bottom Layer w20: K11.2 1032.09,1195 1117.09,1110 1350,1110 1435,1195 1730,1490 v1(1730,1774) ; v1@914.54,3355 1045.4,3355 1085.4,3395 1388,3395 1398,3385 v1(1442,3385)
  other v1: 915,3355
GND: "K6 UART2.4" "K10 UART.3" C1.1 C1D.1 C2.1 C2D.2 C3.2 C6.2 C7.2 C8.2 C9.2 C10.1 C11.2 C12.2 C13.2 D2.2 ENC1B.2 ENC1B.C IC1D.1 IC2.4 IC3.15 IC3.29 IC3.43 K1D.10 K3.1 K7.3 K11.6 K12.10 L2.2 R6.1 R8.1 R9.1 R10.1 R15.1 R20.1 T1.3 T4.3 T5.3 | length 24208.6
  Top Layer w9: K12.10 644,176 644,155 ; K7.3@590,161.87 K7.3 644,155 ; K11.6 775,1120 797.41,1120 980.16,937.25 ; IC3.43 980.16,937.25 ; v1@982.41,962.41 982.41,939.5 980.16,937.25 ; v1(1285,675) 1264.53,695.47 IC3.29 970,695.47 921.1,646.57 IC3.15 921.1,213.1 909,201 909,150 868,109 665,109 644,130 644,155 ; R6.1 1748.58,592.42 1773.04,567.96 1845.04,567.96 ; v1(1939,581) 1925.96,567.96 1845.04,567.96 ; C11.2 2148.47,576.53 2160,565 2300,565 2335,530 2335,227.72 2323.28,216 2179,216 ; C9.2 C8.2@2150,265 ; C8.2 C8.2@2150,265 ; 1845.04,567.96 1863,550 1863,381.93 2028.93,216 2179,216 ; C8.2@2150,265 2150,245 2179,216
  Top Layer w20: K3.1 501.85,3210 C2.1 703,3210 918,3425 970,3425 1031.53,3363.47 C3.2 1031.53,3243 1066.03,3243 1190.85,3118.19 1190.85,3105.68 C13.2 ; C12.2 1031.53,3045 ; R9.1 1063.58,2920 1031.53,2952.06 ; L2.2 1190,1890 ; v1(1212,1778) 1212,1870 1192,1890 ; C7.2 1366.53,3250.53 ; C10.1 1277,1860 1247,1890 1192,1890 ; IC2.4 1550.86,3134.32 1550.86,2935.15 1246.17,2630.46 934.12,2630.46 924.75,2639.83 924.75,2720.1 1014.65,2810 1176.77,2810 1295,2928.23 1295,3053.61 1366.53,3125.14 1366.53,3250.53 ; R6.1 1676.72,630 1665,641.72 1665,774.28 1676.72,786 1748.58,786 R10.1 ; C1.1 1968,2375 1933,2410 T5.3 ; v1@2070.77,701.25 2105.52,666.5 2105.52,657.95 2129.81,633.67 2132.79,633.67 2148.47,617.98 C11.2 ; T1.3 2187.4,1224.29 2193.15,1218.54 2226.1,1218.54 2297.28,1147.36 2297.28,1019.07 2264.37,986.15 D2.2@2264.37,983 ; v1(2200,983) D2.2@2264.37,983 ; D2.2 D2.2@2264.37,983 ; K1D.10 4488.46,2792.04 4488.46,3630.81 4747.64,3890 5240.94,3890 5359,3771.94 5359,3344.36 ; ENC1B.C 5107,716.72 5276.72,716.72 6056,1496 6056,1803 ; IC1D.1 5055,2636.1 5095,2676.1 5095,2762.64 5233.07,2900.72 5233.07,3185.18 5211.6,3206.65 5181.24,3206.65 5146.42,3171.84 5146.42,3168.16 5111.6,3133.35 5081.24,3133.35 5059.76,3154.82 5059.76,3785.18 5081.24,3806.65 5111.6,3806.65 5159.76,3758.49 5159.76,3543.59 5359,3344.36 ; C1D.1 5867,1850 5914,1803 6056,1803 ; 1031.53,2952.06 1027.58,2956 888.58,2956 R8.1 R15.1 888.58,2647.79 979.37,2557 T4.3 T5.3 ; 1031.53,2952.06 1031.53,3045 ; 1031.53,3045 1056.53,3020 1181.53,3020 1206.53,3045 C13.2 ; T5.3 1149.37,2356 1258.58,2246.79 R20.1 1258.58,1958.58 1190,1890 ; 1190,1890 1192,1890 ; C13.2 1207,3090 1207,3243 1206.53,3243 C6.2 1207,3295 1282,3220 1336,3220 1366.53,3250.53 ; 5359,3344.36 5359,2497 5643,2213 5643,2051 5642.94,2050.94 C2D.2 6015,1935 6056,1894 6056,1803
  Bottom Layer w9: v1@982.41,962.41 v1(985,965) 1127,823 1137,823 v1(1285,675) 1845,675 v1(1939,581)
  Bottom Layer w20: 205,1215 275,1285 610,1285 649.09,1245.91 ; K11.6 649.09,1245.91 ; v1(1212,1778) 1135,1701 1135,1195 965.09,1364.91 697.91,1364.91 649.09,1316.09 649.09,1245.91 ; v1@2070.77,701.25 2070,705 2070,706.08 2055,721.08 2055,838 v1(2200,983) ; ENC1B.C 5153.43,763.15 ENC1B.2
  other v1: 2075,700
NetB1_2: B1.2 B2.2 C4.1 C5.1 IC1.2 | length 2632.1
  Top Layer w20: C4.1 2555.75,1044.1 2574.87,1044.1 2574.87,1057.6 ; B1.2 2603.94,823.35 B1.2@2623.46,842.88
  Top Layer w70: 2574.87,1057.6 2616.07,1098.8 2641.07,1098.8 2682.27,1140 ; v2@2584.04,1520.96 2585,1520 2585,1237.27 2682.27,1140 ; B1.2@2623.46,842.88 2623.46,858.99 2664.47,900 3143,900 ; C5.1 2975,1053.23 3061.77,1140 ; B2.2 3068,825 3143,900 ; 2682.27,1140 3061.77,1140 ; 3061.77,1140 3165.04,1140 3245.02,1060.01 3245.02,1002.02 3143,900
  Bottom Layer w70: v2@2584.04,1520.96 2584.04,1623.97 2533,1675.01 2533,1733 IC1.2
  other v2: 2585,1515
NetB1_3: B1.3 B2.4 K1.1 RE1.11 | length 6273.3
  Top Layer w70: v2@2700,221.35 2600,321.35 B1.3 2675,553.35 2845.97,553.35 2910.24,489.09 2910.24,463.79 2970.03,404 3170.06,404 3215,448.94 B2.4
  Bottom Layer w70: K1.1 1172.43,3864 2468.38,3864 2531.34,3801.04 2531.34,3755.26 2643.43,3643.17 RE1.11 2643.43,2070.12 2844.33,1869.22 2844.33,354.33 2715,225 2700,220 v2@2700,221.35
  other v2: 2700,215
NetB1_4: B1.4 K2.1 RE1.22 | length 10920.5
  Top Layer w70: RE1.22 2441.57,3765.28 2266.85,3940 1624.22,3940 1447.73,3763.5 683.35,3763.5 611.85,3835 452.21,3675.36 256.64,3675.36 97,3515.71 97,498 539.5,55.5 2685.5,55.5 2777.5,147.5 2777.5,455.85 B1.4
  Bottom Layer w70: K2.1@611.85,3835 650,3796.85 650,3701.01 691.01,3660 2339.72,3660 RE1.22
NetB2_1: B2.1 C4.2 IC1.1 | length 2896.7
  Top Layer w70: C4.2 2730,1023.47 2725.63,1019.1 2642.43,1019.1 2605.94,982.6 2494.06,982.6 2470.63,1006.03 2470.63,1070.67 2490,1090.04 v1(2490,1464.64) 2490,1579 2519,1608 3281.51,1608 3324,1565.51 3324,934 B2.1
  Bottom Layer w20: v1(2490,1464.64) 2490,1535.29 2483,1542.29 2483,1776.38 2512.64,1806.02 IC1.1
NetB2_3: B2.3 K1.2 RE1.21 | length 5850
  Top Layer w70: v2@2279.96,1874.96 2735,2330 2735,3673.7 RE1.21 ; v2@2694.04,665.96 v2(2695,665) 2841.81,665 3015,491.81 B2.3
  Bottom Layer w70: K1.2 1126.57,4015 2430.51,4015 2611.34,3834.18 2611.34,3800.79 2643.43,3768.71 RE1.21 ; v2@2279.96,1874.96 2279,1870 2279,1536 2526,1289 2526,747.02 2607.07,665.96 v2@2694.04,665.96
  other v2: 2280,1870
NetC3D_2: C3D.2 ENC1B.A K1D.5 R1D.1 | length 3715.4
  Top Layer w20: K1D.5 4272.94,2173.47 4272.94,1965 ; C3D.2 4272.94,1965 ; R1D.1 4888.83,1975.17 4815,2049 4356.94,2049 4272.94,1965
  Bottom Layer w20: K1D.5 4021.42,1901.58 4108.99,1814.01 4199.63,1814.01 4272.62,1887 4363.25,1887 4813,1437.25 4813,1170 4956.57,1026.43 ENC1B.A
NetC4D_2: C4D.2 ENC1B.B K1D.7 R2D.1 | length 3284
  Top Layer w20: v1(4120,1885) 4120,1845 4172,1793 4430.94,1793 4502.94,1865 C4D.2 v1(4577,1935) ; v1(5110,1845) R2D.1 v1(5110,2020)
  Bottom Layer w20: v1(4120,1885) 4120.77,1885.77 4120.77,1909.35 4121.42,1910 K1D.7 ; v1(4577,1935) 4662,2020 v1(5110,2020) ; v1(5110,1845) 5110,1505 5375,1240 5375,886.3 ENC1B.B
NetC5D_2: C5D.2 ENC1B.1 K1D.3 R3D.1 | length 3038.8
  Top Layer w20: v1(4350,1855) 4350,1949 4415,2014 4700,2014 4732.94,1981.06 ; C5D.2 4732.94,1981.06 ; v1(4815,1970) 4744,1970 4732.94,1981.06 ; v1(5280,1963) 5324.87,1963 5340,1947.87 R3D.1
  Bottom Layer w20: K1D.3 3921.42,1902.58 4059,1765 4260,1765 v1(4350,1855) ; ENC1B.1 4956.57,1828.43 v1(4815,1970) 5253,1970 5263,1980 v1(5280,1963)
NetC7_1: C7.1 IC2.6 R4.1 | length 2571.5
  Top Layer w20: R4.1 538.58,2845 500.04,2806.46 362.6,2806.46 322,2847.06 322,2994 243.5,3072.5 243.5,3390.5 338,3485 1234.08,3485 ; v1(1285,3490) 1239.08,3490 1234.08,3485 ; C7.1 1303.47,3415.61 1234.08,3485 ; v1@1393.92,3510 1401.08,3510 1430.13,3480.95 1462.23,3480.95 1525.59,3417.59 IC2.6
  Bottom Layer w20: v1(1285,3490) 1330,3490 1350,3510 v1@1393.92,3510
  other v1: 1400,3510
NetC11_1: C11.1 IC3.28 L1.1 | length 1742
  Top Layer w9: IC3.28 1220.68,675.79 1260.53,635.94 1313.88,635.94 1334.82,615 v1(1420,615) ; C11.1 2355,615 2380,590 v1(2380,492)
  Top Layer w20: C11.1 L1.1
  Bottom Layer w9: v1(1420,615) 1575,460 2348,460 v1(2380,492)
NetC13_1: C13.1 IC2.2 R13.1 | length 2286.2
  Top Layer w20: R13.1 538.58,2731 581,2731 v1(620,2770) ; v1@621.08,2770 v1(620,2770) ; C13.1 1143.47,3124.53 1123.89,3144.11 800,3144.11 682.7,3026.81 682.7,2940.7 653,2911 653,2845.42 620,2812.42 v1(620,2770) ; v1@1495,2950 1500,2955 IC2.2
  Bottom Layer w20: v1@621.08,2770 634.27,2756.82 650,2756.82 831.82,2575 1115,2575 1490,2950 v1@1495,2950
  other v1: 1495,2955
NetC14_1: C14.1 K11.3 | length 1797.4
  Top Layer w9: v1(2069,500) C14.1
  Bottom Layer w9: K11.3 808.62,1286.38 808.62,1250.59 845.65,1213.56 845.65,1185.14 975.6,1055.18 1495.82,1055.18 1890,661 2048,661 2069,640 v1(2069,500)
NetC14_2: C14.2 D3.2 IC3.40 | length 3091.5
  Top Layer w9: IC3.40 1039.21,811.79 v1(1056,795) ; v1(2176.15,1038.05) 2246.64,1037.1 2254.1,1037.1 2259.37,1042.37 D3.2 ; C14.2 2262,500 v1(2282,520)
  Bottom Layer w9: v1(1056,795) 1076.5,774.5 1117.5,774.5 1209.59,682.41 1209.59,620.79 1463.56,366.81 1538.31,366.81 1551,379.5 2356.5,379.5 2420,443 2420,763 2282,901 ; 2216.94,1018.68 cw(c2200,983) 2236.18,998.85 ; v1(2282,520) 2282,901 ; 2236.18,998.85 v1(2176.15,1038.05) 2236.18,998.85 ; 2236.18,998.85 2276.73,906.27 2282,901
NetD1_2: D1.2 RE1.A2 T1.1 | length 3348.7
  Top Layer w20: T1.1 2224.8,1303.03 2328,1199.84 2328,970 2268,910 2264.37,910 D1.2
  Top Layer w70: RE1.A2 1844.21,3645.79 2140,3350 2140,2315 v2(1870,2045) ; v2(2215,1385) 2215.96,1384.04 2215.96,1313.85 T1.1
  Bottom Layer w70: v2(1870,2045) 1870,1720 2016.99,1573.01 2194.04,1395.96 2202.69,1395.96 2213.65,1385 v2(2215,1385)
NetIC1D_2: IC1D.2 LD1.11 | length 633.9
  Top Layer w20: IC1D.2 5005,2708 5162,2865 5162,3135.58 LD1.11
NetIC1D_3: IC1D.3 LD1.4 | length 1171.7
  Top Layer w20: IC1D.3 4955,3105.27 4958.07,3108.35 4958.07,3731.65 LD1.4
NetIC1D_4: IC1D.4 LD1.2 | length 1487.1
  Top Layer w20: IC1D.4 4905,2713 4916,2724 4916,3115.93 4933.07,3133 4933.07,3203.93 4930,3207 4930,3729.93 4933.07,3733 4933.07,3776.8 4987.93,3831.65 5134.76,3831.65 LD1.2
NetIC1D_5: IC1D.5 LD1.5 | length 1171.7
  Top Layer w20: IC1D.5 4855,3728.58 LD1.5
NetIC1D_6: IC1D.6 LD1.7 | length 558.1
  Top Layer w20: LD1.7 4796.42,2719.58 4805,2711 IC1D.6
NetIC1D_7: IC1D.7 LD1.8 | length 613.1
  Top Layer w20: IC1D.7 v1(4755,3028.58)
  Bottom Layer w20: v1(4755,3028.58) LD1.8
NetIC1D_8: IC1D.8 LD1.9 | length 749.7
  Top Layer w20: IC1D.8 v1(4705,2784)
  Bottom Layer w20: v1(4705,2784) 4832,2784 4996.42,2948.42 LD1.9
NetIC1D_9: IC1D.9 LD1.6 | length 1213.1
  Top Layer w20: IC1D.9 4655,3628.58 LD1.6
NetIC1D_12: IC1D.12 LD1.12 | length 1354.1
  Top Layer w20: IC1D.12 4655,2437 4690,2472 5114,2472 5168,2526 5168,2708 5296.42,2836.42 LD1.12
NetIC1D_13: IC1D.13 LD1.10 | length 1821.9
  Top Layer w20: IC1D.13 4705,2270 4578,2270 4578,2437 4673,2532 5058,2532 5120,2594 5120,2743 5258.07,2881.07 5258.07,3195.54 5221.96,3231.65 5158.07,3231.65 LD1.10
NetIC1D_14: IC1D.14 LD1.3 | length 1992.6
  Top Layer w20: IC1D.14 4755,2398 4804,2447 5170,2447 5208,2485 5208,2660 5334,2786 5334,3334 5096.42,3571.58 LD1.3
NetIC1D_15: IC1D.15 LD1.1 | length 2605.6
  Top Layer w20: IC1D.15 4805,2270 4773,2238 4569,2238 4553,2254 4553,3660 4758,3865 5201.42,3865 LD1.1
NetIC1D_17: IC1D.17 K1D.4 | length 1176.4
  Top Layer w20: v1(4891,2245) 4905,2259 IC1D.17
  Bottom Layer w20: K1D.4 3969.42,2477 4659,2477 v1(4891,2245)
NetIC1D_18: IC1D.18 K1D.2 | length 1293
  Top Layer w20: IC1D.18 v1(4955,2378)
  Bottom Layer w20: K1D.2 3882.42,2586 4747,2586 v1(4955,2378)
NetIC2_1: IC2.1 R11.1 R14.2 | length 1762.1
  Top Layer w20: R11.1 183.58,2629.42 243,2570 750,2570 786.42,2606.42 R14.2@786.42,2667.13 ; R14.2 R14.2@786.42,2667.13 ; v1@839.23,2614.31 R14.2@786.42,2667.13 ; v1@1467,3017 1471,3025 1474.41,3030.57 IC2.1
  Bottom Layer w20: v1@839.23,2614.31 840,2605 845,2600 1050,2600 v1@1467,3017
  other v1: 840,2615 1470,3025
NetIC2_3: IC2.3 R12.2 R15.2 | length 3812.2
  Top Layer w20: R12.2 436.42,2724 240,2724 147,2817 147,3495 182,3530 1308.28,3530 1343,3495.28 1343,3394.09 1407.21,3329.88 1407.21,3130.47 1320,3043.26 1320,2984.63 1326,2978.63 1326,2920 ; R15.2 961.42,2720 1025.42,2784 1190,2784 1326,2920 ; IC2.3 1525.59,2945.24 1500.36,2920 1326,2920
NetIC2_5: IC2.5 R1.2 R8.2 | length 2622.9
  Top Layer w20: R1.2 261.42,2805.58 275.56,2791.44 287.48,2791.44 v1@303.92,2775 ; R8.2 961.42,2836 1166,2836 1200,2870 v1(1200,2903) ; v1@1349.23,3014.23 1350,3015 1345,3015 1432.21,3102.21 1432.21,3340.23 1368,3404.44 1368,3521.18 1383.82,3537 1441.54,3537 1551.18,3427.36 IC2.5
  Bottom Layer w20: v1@303.92,2775 v1(305,2775) 390,2860 660.36,2860 677.47,2842.88 677.47,2829.34 723.82,2783 1080,2783 v1(1200,2903) 1311.23,3014.23 v1@1349.23,3014.23
  other v1: 1350,3020
NetIC2_7: IC2.7 R1.1 R5.2 | length 2331.8
  Top Layer w20: R1.1 188.58,2934 262,2934 v1(277,2949) ; v1(735,2810) 735.77,2810.77 774.68,2810.77 786.42,2822.5 R5.2 ; v1(1455,3450) 1500,3405 IC2.7@1500,3323.46
  Bottom Layer w20: v1(735,2810) 702.47,2842.53 702.47,2853.24 606.71,2949 v1(277,2949) 798,3470 1115.96,3470 1135.96,3450 v1(1455,3450)
NetIC3_1: IC3.1 K12.5 | length 630.6
  Top Layer w9: K12.5 325,695 533.73,695 672,833.27 IC3.1
NetIC3_2: IC3.2 K12.7 | length 663.8
  Top Layer w9: K12.7 325,595 546.42,595 765,813.58 IC3.2
NetIC3_3: IC3.3 K12.9 | length 697.1
  Top Layer w9: K12.9 282.67,452.67 319.01,452.67 366.33,499.99 478.28,499.99 772.19,793.9 IC3.3
NetIC3_11: IC3.11 K7.2 R16.2 | length 3708.9
  Top Layer w9: v1(450,315) 405,360 303.41,360 234.99,428.43 234.99,761.57 264.41,791 295.46,791 315.01,810.55 315.01,1017.34 250,1082.34 250,1289.13 320.28,1359.41 1354.09,1359.41 1543.5,1170 R16.2 ; K7.2 690,596.42 730,636.42 IC3.11
  Bottom Layer w20: v1(450,315) 530,315 K7.2
NetIC3_16: IC3.16 K5.1 | length 413.5
  Top Layer w9: IC3.16 940.79,516 955,501.79 K5.1
NetIC3_17: IC3.17 K5.2 | length 446.7
  Top Layer w9: IC3.17 960.47,526.53 975,512 975,320 1021,274 1021,189 K5.2
NetIC3_23: IC3.23 K9.1 | length 459.9
  Top Layer w9: IC3.23 1078.58,281.42 K9.1
NetIC3_24: IC3.24 K9.2 | length 493.2
  Top Layer w9: IC3.24 1098.27,361.73 K9.2
NetIC3_25: IC3.25 K9.3 | length 640.7
  Top Layer w9: IC3.25 1196.5,616.73 1215.73,597.5 1298.58,597.5 1359,537.08 1359,201 K9.3
NetIC3_26: IC3.26 K9.4 | length 724.8
  Top Layer w9: IC3.26 1215.5,636.42 1235.42,616.5 1306.45,616.5 1326.95,596 1359,596 1462,493 1462,198 K9.4
NetIC3_27: IC3.27 K9.5 | length 939.2
  Top Layer w9: IC3.27 1152.24,655.92 1122.43,655.92 1109.34,642.83 1109.34,601 1113.74,596.6 1113.74,425.05 1347,191.79 1347,153.61 1400.6,100 1550,100 K9.5
NetIC3_31: IC3.31 K4.1 | length 1333
  Top Layer w9: IC3.31 1180.29,734.84 1184.5,739.06 1186.44,739.06 1197.38,750 1560,750 1585,725 1585,328.22 1583.83,328.22 1553.11,297.5 1553.11,143.72 1523.4,114 1486.6,114 1447,153.61 1447,172.4 1405,214.39 K4.1
NetIC3_32: IC3.32 K4.2 | length 704.4
  Top Layer w9: v1(1078,735) 1097.53,754.53 IC3.32
  Bottom Layer w9: v1(1078,735) 1078,717 K4.2
NetIC3_33: IC3.33 K4.3 | length 916.8
  Top Layer w9: IC3.33 1570.79,774.21 1605,740 K4.3
NetIC3_34: "K6 UART2.2" IC3.34 | length 532.7
  Top Layer w9: IC3.34 1248,793.9 1303,848.9 1303,1163 1335,1195
NetIC3_35: "K6 UART2.3" IC3.35 | length 449.4
  Top Layer w9: IC3.35 1210,813.58 1235,838.58 1235,1195
NetIC3_38: IC3.38 K11.1 | length 685.1
  Top Layer w9: K11.1 1102.72,1295 1181,1216.72 1181,1060.42 1078.58,958 IC3.38
NetIC3_39: IC3.39 K11.4 | length 442.1
  Top Layer w9: IC3.39 1058.9,978.9 v1(1060,980)
  Bottom Layer w9: K11.4 805.2,1195 1020.2,980 v1(1060,980)
NetIC3_41: IC3.41 K11.5 | length 636.9
  Top Layer w9: K11.5 745.65,1249.35 909.86,1249.35 1020.5,1138.71 1020.5,950.3 1019.53,949.32 IC3.41
NetIC3_44: "K10 UART.1" IC3.44 | length 716.1
  Top Layer w9: 405,1215 624,996 894.54,996 960.29,930.25 960.29,887.6 IC3.44
NetIC3_45: "K10 UART.2" IC3.45 | length 792.2
  Top Layer w9: 305,1215 543,977 886.67,977 940.61,923.06 940.61,887.6 IC3.45
NetIC3_46: IC3.46 K12.4 R22.2 | length 1771.7
  Top Layer w9: v1(921.1,783) IC3.46 ; v1(1498,837) 1606,945 R22.2
  Bottom Layer w9: K12.4 883.1,745 v1(921.1,783) 945,806.9 945,955.41 976.09,986.5 993.91,986.5 1143.41,837 v1(1498,837)
NetIC3_47: IC3.47 K12.2 R21.2 | length 2719.1
  Top Layer w9: IC3.47 901.24,887.6 901.24,923.06 889.8,934.5 464.5,934.5 K12.2 375,993.57 264,1104.56 264,1239.05 365.36,1340.41 1254.64,1340.41 1389,1206.04 1389,1150.35 1479.35,1060 R21.2
NetIC3_48: IC3.48 K12.3 | length 685.3
  Top Layer w9: K12.3 275,777 307,777 325,795 541,795 634,888 881.73,888 IC3.48
NetK2_2: K2.2 RE1.12 RE1.24 | length 2986.2
  Top Layer w70: RE1.12 2447.43,3472.43 2447.43,3615.86 2557.09,3725.52 2557.09,3828.99 2598.09,3870 2737.13,3870 RE1.24
  Bottom Layer w70: K2.2 430,3820 575,3675 575,3580 2335,3580 RE1.12
NetK3_2: K3.2 R2.1 R4.2 R9.2 R13.2 | length 1929.2
  Top Layer w20: K3.2 335,3088.58 363.58,3060 R2.1 363.58,2877 404.13,2836.46 477.09,2836.46 487,2846.37 487,2936 611.42,2936 ; R13.2 611.42,2630 607.87,2626.46 497,2626.46 497,2745 499,2745 611.42,2857.42 R4.2 611.42,2936 ; v1(628,2997) 628,2975.58 611.42,2959 611.42,2936 ; R9.2 1136.42,2892.87 1179.23,2935.69 1179.23,2974.23 v1(1180,2975)
  Bottom Layer w20: v1(628,2997) 1111,2997 1133,2975 v1(1180,2975)
NetK8_1: K8.1 L2.4 | length 759.4
  Top Layer w70: K8.1 250,1863.43 250,1710.51 293.93,1666.57 356.07,1666.57 479.45,1789.96 L2.4 L2.4
NetK8_2: K8.2 L2.3 | length 417.7
  Top Layer w70: K8.2 473.47,1890.04 L2.3 L2.3
NetL2_1: L2.1 T3.3 | length 1102.2
  Top Layer w20: 340,2025 351.72,2013.28
  Top Layer w70: T3.3 257.56,2205.24 288.19,2174.61 288.19,2168.82 340,2117.01 340,2025 ; 351.72,2013.28 756.72,2013.28 880.74,1889.26 880.74,1845.19 935.93,1790 L2.1
NetR7_2: R7.2 R10.2 T1.2 | length 988.6
  Top Layer w20: R7.2 R7.2@1821.42,750 ; R10.2 R7.2@1821.42,750 ; v1(1890,750) R7.2@1821.42,750 ; v1(1890,1305) T1.2
  Bottom Layer w20: v1(1890,750) v1(1890,1305)
NetR11_2: R11.2 R12.1 | length 107.2
  Top Layer w20: R11.2 R12.1
NetR17_1: R17.1 R18.1 T2.2 T2.3 T4.1 T5.1 T5.2 | length 1320.2
  Top Layer w20: R17.1 728.58,2234 ; v1(860,2503) 860,2456 ; T4.1 868.6,2447.4 860,2456 ; R18.1 903.58,2234 728.58,2234 ; v1@1041.92,2503 v1(1045,2505) 1045,2503.92 1062.91,2486 1062.91,2453.15 1068.66,2447.4 T5.1 ; T5.2 1070.63,2335 860,2335 860,2434.8 ; 728.58,2234 728.58,2326 725.63,2328.95 T2.2 725.63,2410 T2.3 835.2,2410 860,2434.8 ; 860,2434.8 860,2456
  Bottom Layer w20: v1(860,2503) v1@1041.92,2503
NetR18_2: R18.2 T3.1 | length 1178.6
  Top Layer w20: T3.1 287.69,2384.76 297.37,2394.45 297.37,2417.37 353.92,2473.92 627.03,2473.92 683.54,2417.4 683.54,2131 726.26,2088.28 949.83,2088.28 976.42,2114.87 R18.2
NetR19_2: R19.2 R20.2 T4.2 | length 4840.6